# Altium PCB hand_shank.PcbDoc
Units mil, origin at the board's own origin, x right, y up, seen from the top; angles counter-clockwise.
Board outline 2952.71 x 2952.71 mil, 2 copper layers (Top Layer, Bottom Layer), stack 62.192 mil thick; 73 components, 56 nets, 284 pads, 302 vias.
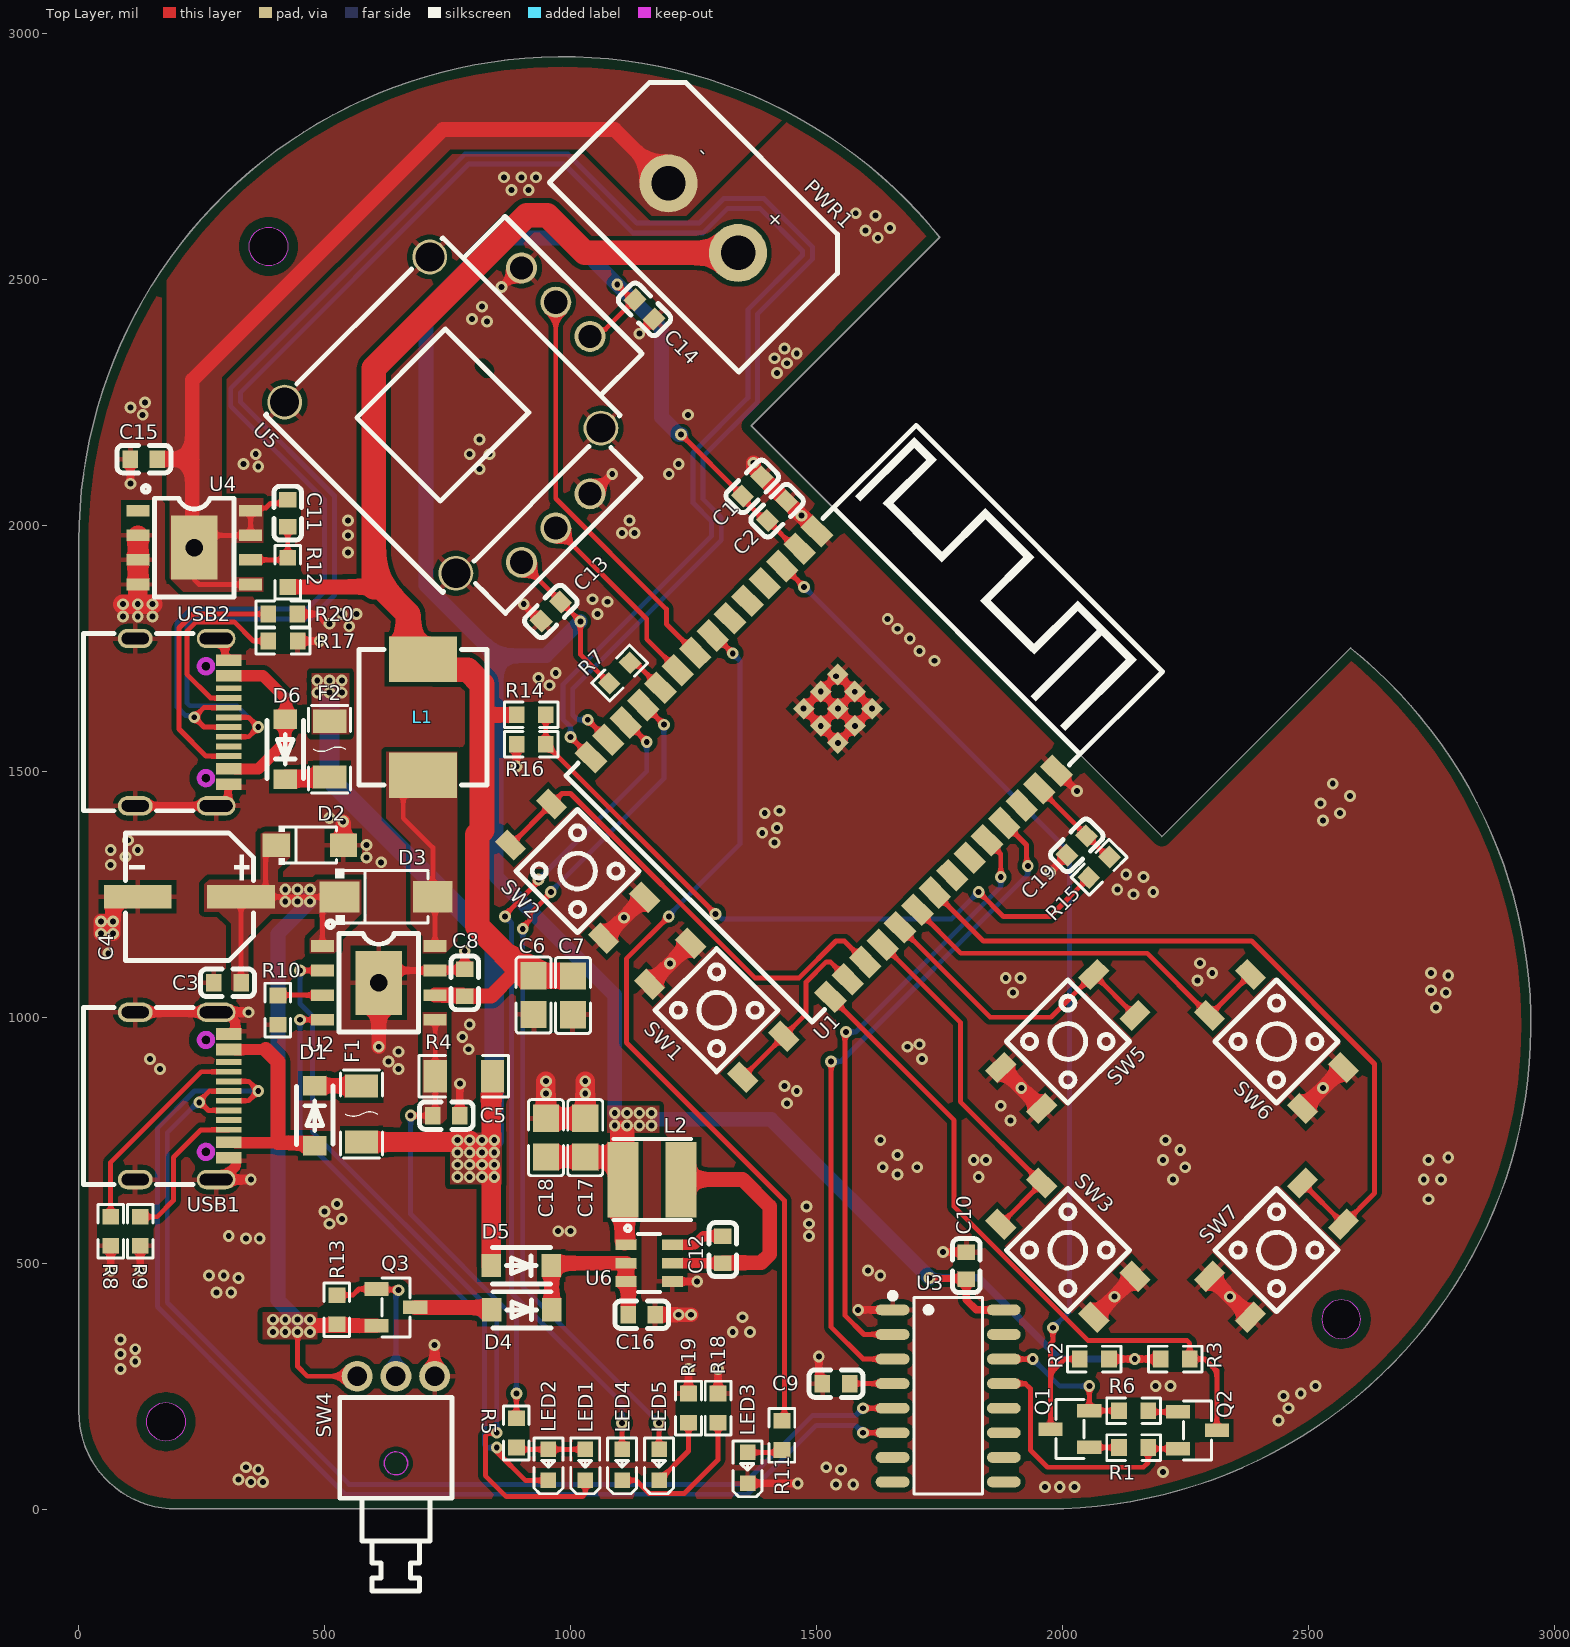
[diagram p0: Top Layer view]
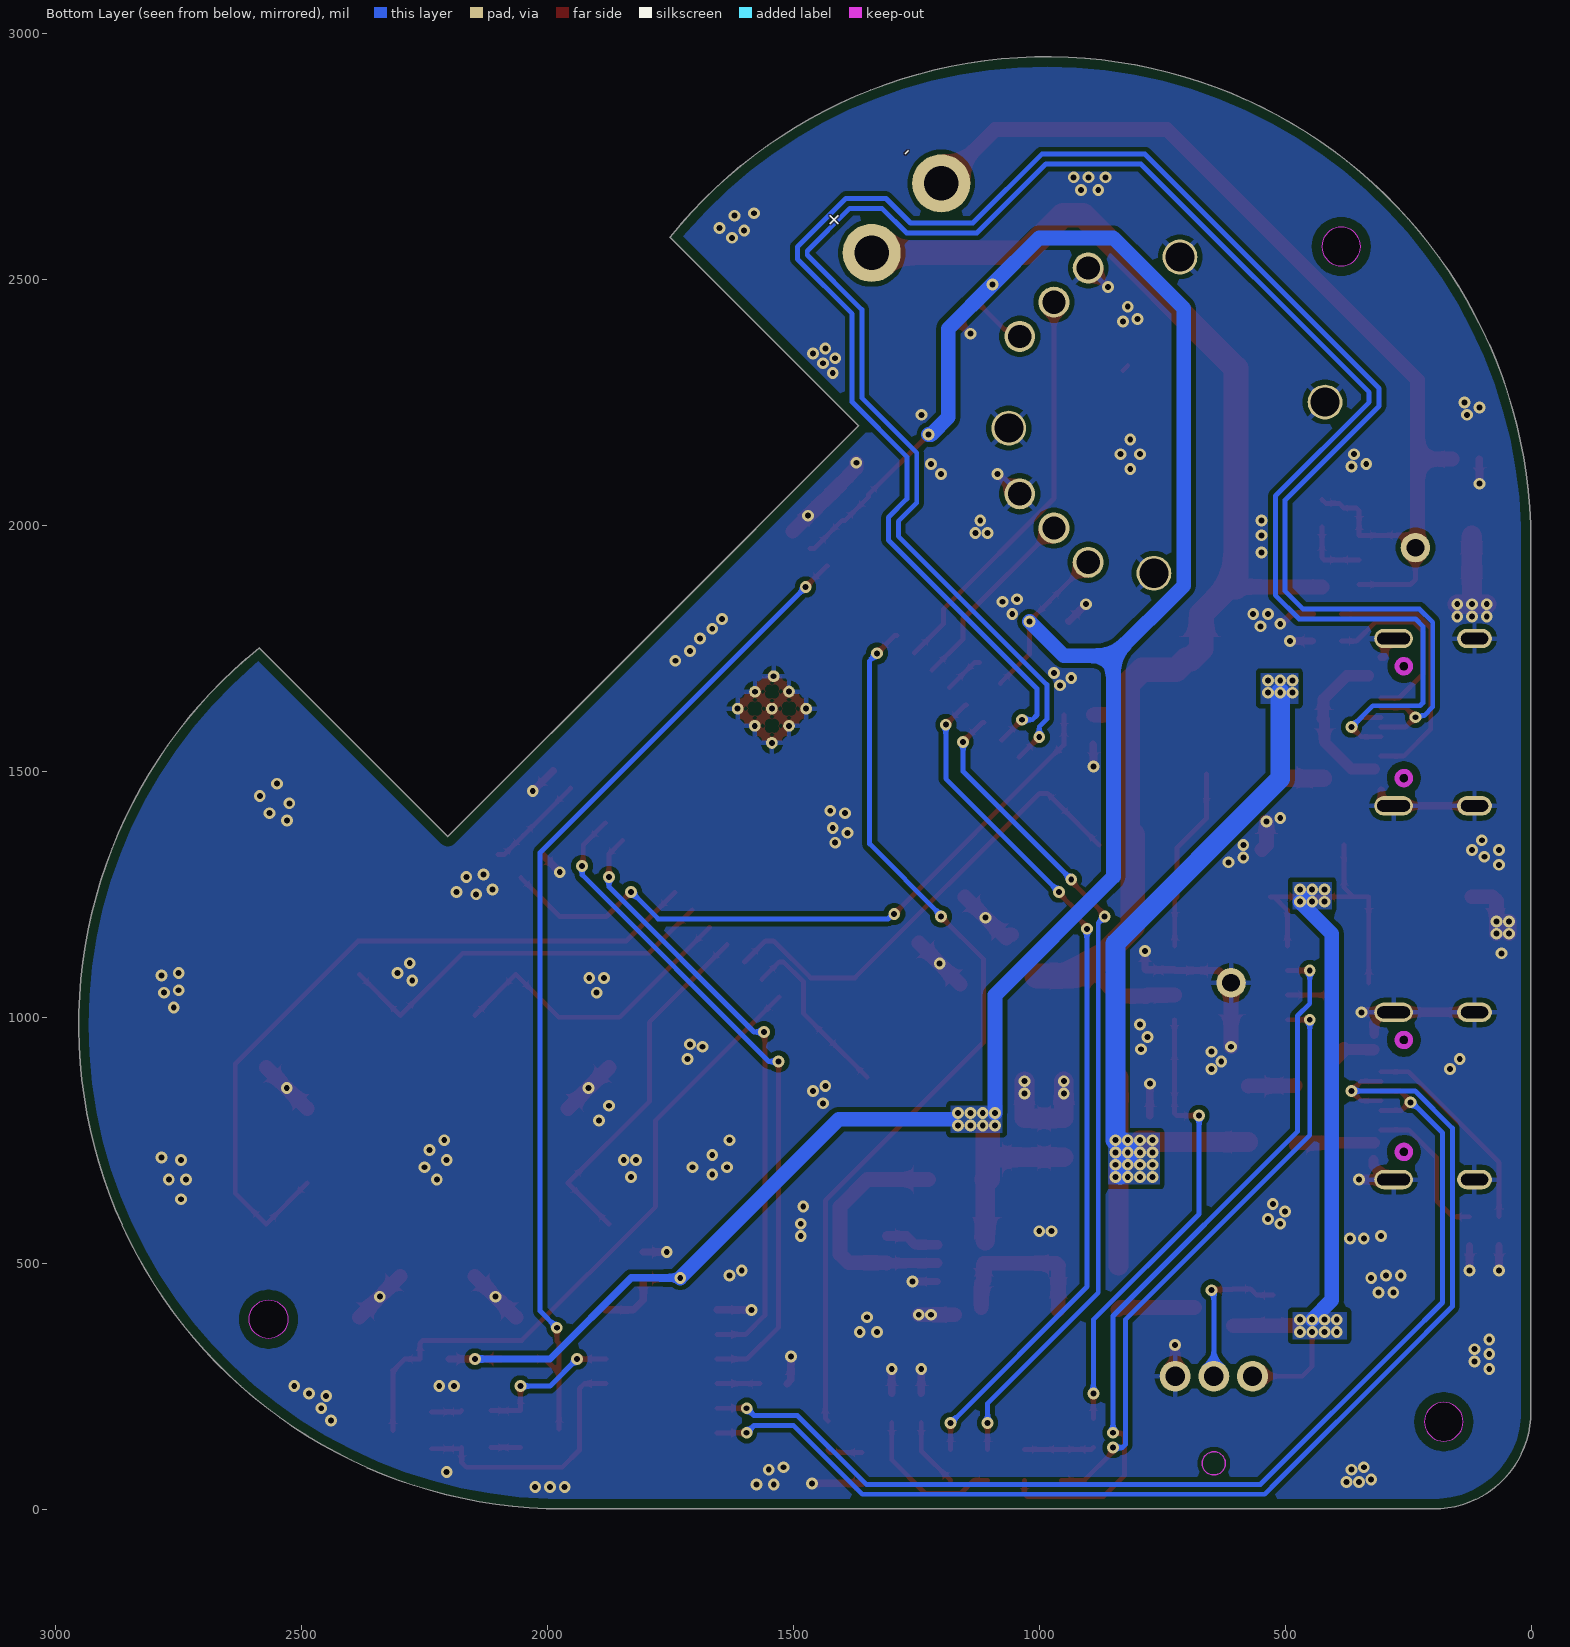
[diagram p1: Bottom Layer view, seen from below]
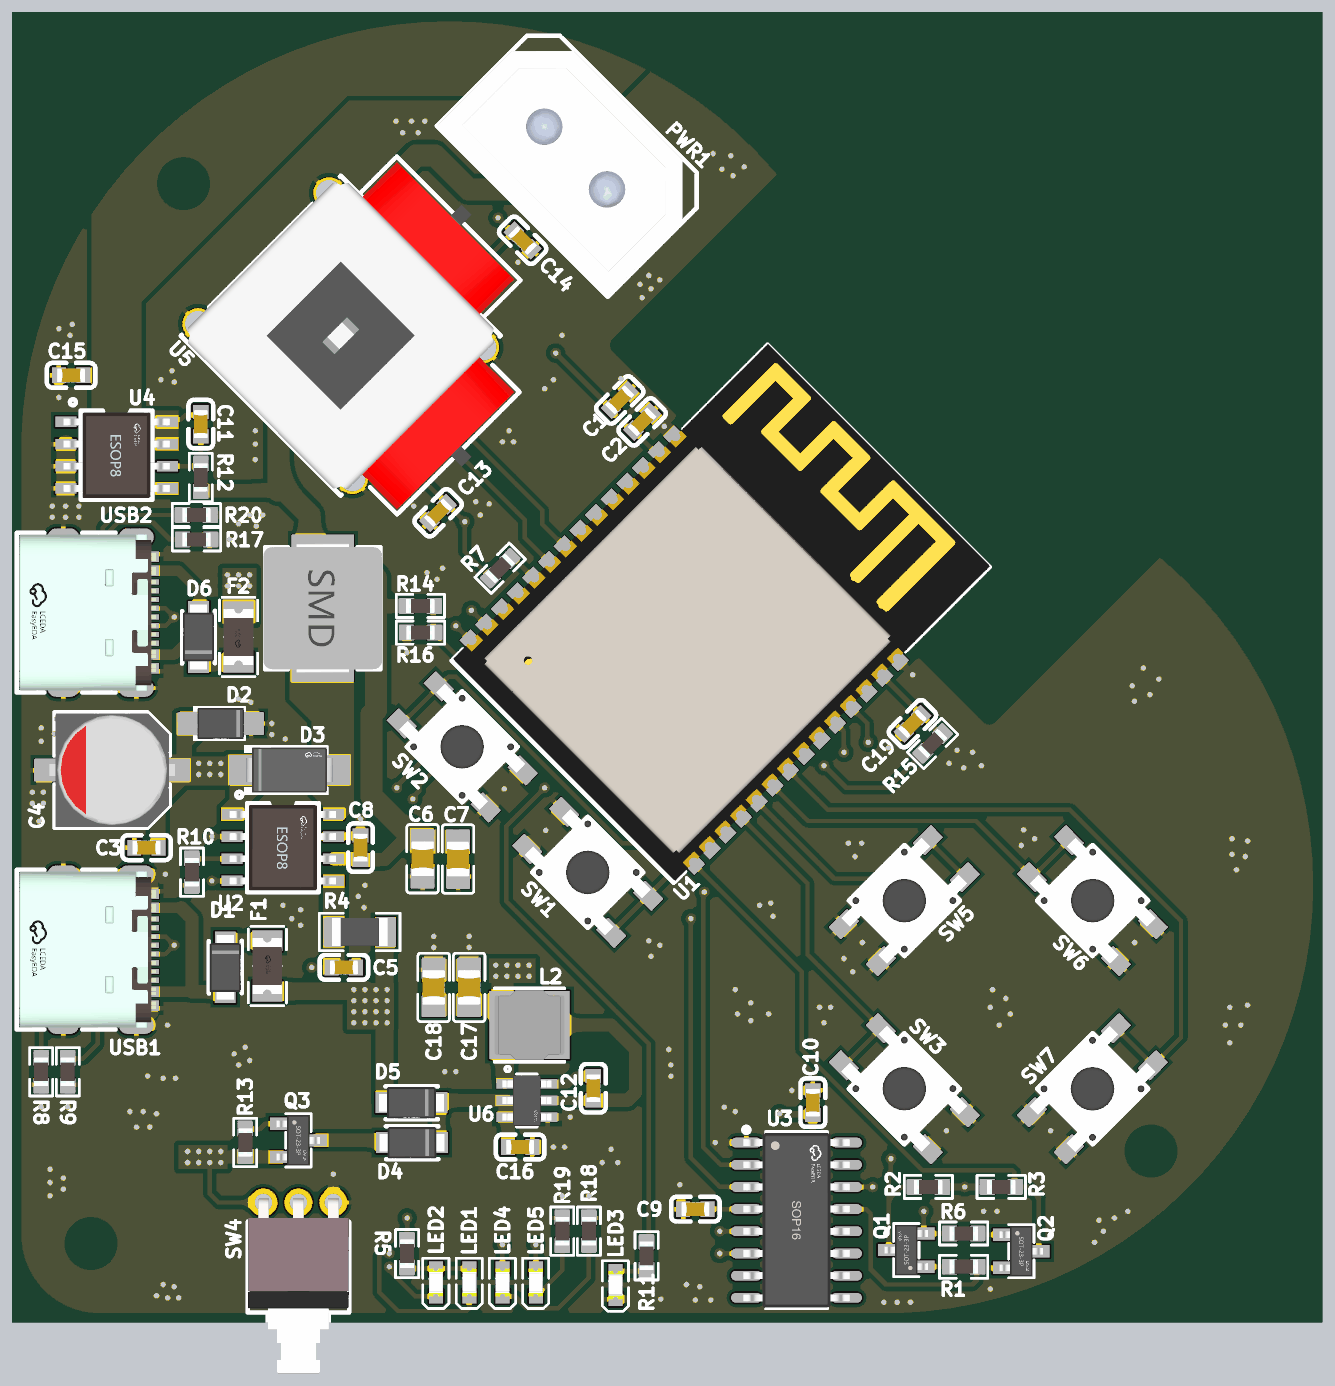
[diagram p2: 3D render of the assembled board from above, using the file's embedded part models]

## Layer stack, top to bottom
Top Solder: solder mask 0.4, Solder Resist, Dk 3.5
Top Layer: signal copper 1.4
Dielectric 1: dielectric 59.3921, FR-4, Dk 4.8
Bottom Layer: signal copper 1.4
Bottom Solder: solder mask 0.4, Solder Resist, Dk 3.5

## Board outline
195.55,0.26 198.66,0.26 cw(c197.11,197.11) 0.26,198.66 0.26,1968.76 cw(c984.51,1968.76) 1751.02,2586.18 1367.44,2202.61 1785.02,1785.02 2202.61,1367.44 2586.18,1751.02 cw(c1968.76,984.51) 1968.76,0.26
cut-out: 2527.93,385.97 ccw(c2567.3,385.97) 2567.3,346.6 ccw(c2567.3,385.97) 2606.67,385.97 ccw(c2567.3,385.97) 2567.3,425.34 ccw(c2567.3,385.97)
cut-out: 385.97,2527.93 cw(c385.97,2567.3) 346.6,2567.3 cw(c385.97,2567.3) 385.97,2606.67 cw(c385.97,2567.3) 425.34,2567.3 cw(c385.97,2567.3)
cut-out: 138.05,177.42 cw(c177.42,177.42) 177.42,216.79 cw(c177.42,177.42) 216.79,177.42 cw(c177.42,177.42) 177.42,138.05 cw(c177.42,177.42)

## Design rules (kind name [scope] priority, off if disabled: settings)
AssemblyTestPointUsage [All] p1: isadvanced=TRUE
AssemblyTestpoint [All] p1: isadvanced=TRUE testpointundercomponent=TRUE minsize=40 maxsize=100 preferedsize=60 minholesize=0 maxholesize=40 preferedholesize=32 testpointgrid=1 usegrid=TRUE gridtolerance=0.01 allowsidetop=TRUE allowsidebottom=TRUE
BoardOutlineClearance Footprint_BoardOutlineClearance [HasFootprint('USB-C-SMD_KH-TYPE-C-16P')] p1: isadvanced=TRUE gap=0 ignorepadtopadclearanceinfootprint=FALSE
BoardOutlineClearance TopLayer_BoardOutlineClearance [(OnLayer('Top Overlay'))] p2: isadvanced=TRUE gap=0 ignorepadtopadclearanceinfootprint=FALSE
BoardOutlineClearance [All] p3: isadvanced=TRUE gap=20 ignorepadtopadclearanceinfootprint=FALSE except(0: Arc-SplitContinuation Track-SplitContinuation SMDPad-SplitContinuation THPad-SplitContinuation Via-SplitContinuation Fill-SplitContinuation Poly-SplitContinuation Region-SplitContinuation Text-OutlineEdge Text-CavityEdge Text-CutoutEdge Text-SplitBarrior Text-SplitContinuation; 25: SMDPad-OutlineEdge SMDPad-CavityEdge SMDPad-CutoutEdge SMDPad-SplitBarrior Via-OutlineEdge Via-CavityEdge Via-CutoutEdge Via-SplitBarrior; 30: THPad-OutlineEdge THPad-CavityEdge THPad-CutoutEdge THPad-SplitBarrior)
Clearance type-c [HasFootprint('USB-C-SMD_KH-TYPE-C-16P')] p1: isadvanced=TRUE gap=0 ignorepadtopadclearanceinfootprint=TRUE
Clearance Clearance_1 [InNetClass('Power') And OnMid vs OnMid] p2: gap=10 ignorepadtopadclearanceinfootprint=FALSE sourcerule=60 cellrowname=Power cellrowtype=2 cellcolname=All cellcoltype=0 innerlayers=TRUE
Clearance Clearance_2 [InNetClass('Power') And (ExistsOnLayer('Top Layer') Or ExistsOnLayer('Bottom Layer')) vs (ExistsOnLayer('Top Layer') Or ExistsOnLayer('Bottom Layer'))] p3: gap=10 ignorepadtopadclearanceinfootprint=FALSE sourcerule=60 cellrowname=Power cellrowtype=2 cellcolname=All cellcoltype=0 outerlayers=TRUE
Clearance Clearance_3 [InNetClass('Power')] p4: gap=10 ignorepadtopadclearanceinfootprint=FALSE sourcerule=60 cellrowname=Power cellrowtype=2 cellcolname=All cellcoltype=0
Clearance Clearance_1 [InNetClass('Power') And OnMid vs InNetClass('Power') And OnMid] p5: gap=10 ignorepadtopadclearanceinfootprint=FALSE sourcerule=60 cellrowname=Power cellrowtype=2 cellcolname=Power cellcoltype=2 innerlayers=TRUE
Clearance Clearance_2 [InNetClass('Power') And (ExistsOnLayer('Top Layer') Or ExistsOnLayer('Bottom Layer')) vs InNetClass('Power') And (ExistsOnLayer('Top Layer') Or ExistsOnLayer('Bottom Layer'))] p6: gap=10 ignorepadtopadclearanceinfootprint=FALSE sourcerule=60 cellrowname=Power cellrowtype=2 cellcolname=Power cellcoltype=2 outerlayers=TRUE
Clearance Clearance_3 [InNetClass('Power') vs InNetClass('Power')] p7: gap=10 ignorepadtopadclearanceinfootprint=FALSE sourcerule=60 cellrowname=Power cellrowtype=2 cellcolname=Power cellcoltype=2
Clearance Clearance_1 [OnMid vs OnMid] p8: gap=6 ignorepadtopadclearanceinfootprint=FALSE except(6.9: Arc-Hole Track-Hole SMDPad-Hole THPad-Hole Via-Hole Fill-Hole Poly-Hole Region-Hole Text-Hole; 10: Hole-Hole) sourcerule=60 cellrowname=All cellrowtype=0 cellcolname=All cellcoltype=0 innerlayers=TRUE
Clearance Clearance_2 [(ExistsOnLayer('Top Layer') Or ExistsOnLayer('Bottom Layer')) vs (ExistsOnLayer('Top Layer') Or ExistsOnLayer('Bottom Layer'))] p9: gap=6 ignorepadtopadclearanceinfootprint=FALSE except(6.9: Arc-Hole Track-Hole SMDPad-Hole THPad-Hole Via-Hole Fill-Hole Poly-Hole Region-Hole Text-Hole; 10: Hole-Hole) sourcerule=60 cellrowname=All cellrowtype=0 cellcolname=All cellcoltype=0 outerlayers=TRUE
Clearance [All] p10: gap=10 ignorepadtopadclearanceinfootprint=FALSE ismatrix=TRUE miname0="All Differential Pairs" mitype0=4 miname1=Power mitype1=2
ComponentClearance [All] p1: isadvanced=TRUE gap=10 collisioncheckmode=3 verticalgap=10 showdistances=FALSE
DiffPairsRouting "Schematic Differential Pairs Routing" [InNetClass('Power')] p1: maxlimit=10 minlimit=10 mostfreqgap=10 toplayer_minwidth=15 toplayer_maxwidth=15 toplayer_prefwidth=15 bottomlayer_minwidth=15 bottomlayer_maxwidth=15 bottomlayer_prefwidth=15 maxuncoupledlength=500
DiffPairsRouting "Schematic Differential Pairs Routing_1" [InDifferentialPairClass('All Differential Pairs')] p2: maxlimit=10 minlimit=10 mostfreqgap=10 toplayer_minwidth=10 toplayer_maxwidth=10 toplayer_prefwidth=10 bottomlayer_minwidth=10 bottomlayer_maxwidth=10 bottomlayer_prefwidth=10 maxuncoupledlength=500
DiffPairsRouting [All] p3: maxlimit=10 minlimit=10 mostfreqgap=10 toplayer_minwidth=15 toplayer_maxwidth=15 toplayer_prefwidth=15 bottomlayer_minwidth=15 bottomlayer_maxwidth=15 bottomlayer_prefwidth=15 maxuncoupledlength=500
FabricationTestPointUsage [All] p1: isadvanced=TRUE valid=0 allowmultiple=FALSE
FabricationTestpoint [All] p1: isadvanced=TRUE side=3 testpointundercomponent=TRUE minsize=40 maxsize=100 preferedsize=60 minholesize=0 maxholesize=40 preferedholesize=32 testpointgrid=1 allowsidetop=TRUE allowsidebottom=TRUE usegrid=TRUE gridtolerance=0.01
FanoutControl Fanout_BGA [IsBGA] p1: isadvanced=TRUE bgadir=Out bgaviamode=Centered fanoutstyle=Auto fanoutdirection=Alternating viagrid=1 // Fanout_BGA (Default Rule)
FanoutControl Fanout_LCC [IsLCC] p2: isadvanced=TRUE bgadir=Out bgaviamode=Centered fanoutstyle=Auto fanoutdirection=Alternating viagrid=1 // Fanout_LCC (Default Rule)
FanoutControl Fanout_SOIC [IsSOIC] p3: isadvanced=TRUE bgadir=Out bgaviamode=Centered fanoutstyle=Auto fanoutdirection=Alternating viagrid=1 // Fanout_SOIC (Default Rule)
FanoutControl Fanout_Small [(CompPinCount < 5)] p4: isadvanced=TRUE bgadir=Out bgaviamode=Centered fanoutstyle=Auto fanoutdirection=OutThenIn viagrid=1 // Fanout_Small (Default Rule)
FanoutControl Fanout_Default [All] p5: isadvanced=TRUE bgadir=Out bgaviamode=Centered fanoutstyle=Auto fanoutdirection=Alternating viagrid=1 // Fanout_Default (Default Rule)
Height [All] p1: isadvanced=TRUE minheight=0 maxheight=1000 prefheight=500
HoleSize [All] p1: isadvanced=TRUE absolutevalues=TRUE maxlimit=100 minlimit=1 maxpercent=80.000 minpercent=20.000
HoleToHoleClearance [All] p1: isadvanced=TRUE gap=10 allowstackedmicrovias=TRUE
LayerPairs [All] p1: isadvanced=TRUE enforce=TRUE
MinimumSolderMaskSliver TypeC_MinimumSolderMaskSliver [HasFootprint('USB-C-SMD_KH-TYPE-C-16P') vs HasFootprint('USB-C-SMD_KH-TYPE-C-16P')] p1: isadvanced=TRUE minsoldermaskwidth=2
MinimumSolderMaskSliver [All] p2: isadvanced=TRUE minsoldermaskwidth=6
NetAntennae [All] p1: isadvanced=TRUE netantennaetolerance=0
PasteMaskExpansion [All] p1: isadvanced=TRUE expansion=0
PlaneClearance [All] p1: isadvanced=TRUE clearance=20
PlaneConnect [All] p1: isadvanced=TRUE planeconnectstyle=Relief reliefexpansion=20 reliefentries=4 reliefconductorwidth=10 reliefairgap=10
PolygonConnect Solid [InNetClass('Power') AND (Net <> 'GND')] p1: isadvanced=TRUE connectstyle=Direct reliefconductorwidth=10 reliefentries=2 polygonreliefangle="0 Angle" airgapwidth=10
PolygonConnect "Schematic Polygon Connect Style" [InNetClass('Power')] p2: thpad.connectstyle=Relief thpad.reliefconductorwidth=10 thpad.reliefentries=4 thpad.polygonreliefangle="90 Angle" thpad.airgapwidth=10 smdpad.connectstyle=Relief smdpad.reliefconductorwidth=10 smdpad.reliefentries=4 smdpad.polygonreliefangle="90 Angle" smdpad.airgapwidth=10 via.connectstyle=Direct via.reliefconductorwidth=10 via.reliefentries=4 via.polygonreliefangle="90 Angle" via.airgapwidth=10
PolygonConnect [All] p3: thpad.connectstyle=Relief thpad.reliefconductorwidth=10 thpad.reliefentries=4 thpad.polygonreliefangle="90 Angle" thpad.airgapwidth=10 smdpad.connectstyle=Relief smdpad.reliefconductorwidth=10 smdpad.reliefentries=4 smdpad.polygonreliefangle="90 Angle" smdpad.airgapwidth=10 via.connectstyle=Direct via.reliefconductorwidth=10 via.reliefentries=4 via.polygonreliefangle="90 Angle" via.airgapwidth=10
RoutingCorners [All] p1: isadvanced=TRUE cornerstyle=45-Degree minsetback=100 maxsetback=100
RoutingPriority [All] p1: isadvanced=TRUE routingpriority=0
RoutingVias "Schematic Routing Via Style" [InNetClass('Power')] p1: holewidth=12 width=24 viastyle="Through Hole" minholewidth=12 minwidth=24 maxholewidth=12 maxwidth=24
RoutingVias [All] p2: holewidth=12 width=24 viastyle="Through Hole" minholewidth=12 minwidth=24 maxholewidth=12 maxwidth=24
ShortCircuit [All] p1: isadvanced=TRUE allowed=FALSE
SilkToSilkClearance [All] p1: isadvanced=TRUE silktosilkclearance=0
SilkToSolderMaskClearance [IsPad] p1: isadvanced=TRUE minsilkscreentomaskgap=0 clearancetoexposedcopper=TRUE
SolderMaskExpansion ViaMaskExpansion [IsVia] p1: isadvanced=TRUE expansion=4 istentingtop=TRUE
SolderMaskExpansion [All] p2: isadvanced=TRUE expansion=4 istentingtop=FALSE
SupplyNets "Schematic Supply Nets_5" [InNet('PW_5V')] p1: isadvanced=TRUE voltage=0.000
SupplyNets "Schematic Supply Nets_4" [InNet('PW_BAT4.2V')] p2: isadvanced=TRUE voltage=0.000
SupplyNets "Schematic Supply Nets_3" [InNet('PW_D3.3V')] p3: isadvanced=TRUE voltage=0.000
SupplyNets "Schematic Supply Nets_2" [InNet('PW_D5V')] p4: isadvanced=TRUE voltage=0.000
SupplyNets "Schematic Supply Nets_1" [InNet('GND')] p5: isadvanced=TRUE voltage=0.000
SupplyNets "Schematic Supply Nets" [InNet('PW_USB5V')] p6: isadvanced=TRUE voltage=0.000
UnRoutedNet [All] p1: isadvanced=TRUE
UnpouredPolygon [All] p1: isadvanced=TRUE
Width "Schematic Width Constraint" [InNetClass('Power')] p1: maxlimit=150 minlimit=10 preferedwidth=30 minimp=50.000000 maximp=50.000000 favimp=50.000000
Width [All] p2: maxlimit=10 minlimit=10 preferedwidth=10
3 further rules are at their usual default settings.

## Classes and differential pairs
net class Power: GND NetC5_2 NetC11_2 NetC12_1 NetC12_2 NetD1_1 NetD1_2 NetD3_2 NetD4_2 NetD6_1 NetD6_2 PW_5V PW_BAT4.2V PW_D3.3V PW_D5V PW_USB5V
differential pair D2: +D2_P -D2_N
differential pair D: +D_P -D_N

## Components (designator, comment, footprint, x,y, rotation, side; value= is the part's Value field where it differs from the comment)
C1 "10uF ±20%" C0603 1369.49,2079.49 r225 top locked
C2 "100nF ±10%" C0603 1420,2030 r225 top locked
C3 "100nF ±10%" C0603 302.44,1070 r0 top locked
C4 "47uF ±20%" CAP-SMD_BD6.3-L6.5-W6.5-LS7.2-FD 225,1245 r180 top locked
C5 "10uF ±20%" C0603 747.56,800 r180 top
C6 "22uF ±20%" C0805 925,1045 r90 top
C7 "22uF ±20%" C0805 1005,1044.37 r90 top
C8 "100nF ±10%" C0603 785,1070 r90 top
C9 "100nF ±10%" C0603 1540,255 r0 top locked
C10 "100nF ±10%" C0603 1805,495 r270 top locked
C11 "4.7uF ±10%" C0603 425,2025 r90 top locked
C12 "100nF ±10%" C0603 1310,527.56 r270 top locked
C13 "100nF ±10%" C0603 960,1825 r45 top
C14 "100nF ±10%" C0603 1150.51,2439.49 r135 top
C15 "2.2uF ±10%" C0603 132.56,2135 r180 top locked
C16 "10uF ±20%" C0603 1145,395 r0 top locked
C17 "22uF ±20%" C0805 1030,755 r270 top locked
C18 "22uF ±20%" C0805 950,755 r270 top locked
C19 "100nF ±10%" C0603 2029.49,1349.49 r45 top
D1 "SS14L" SOD-123F_L2.8-W1.8-LS3.7-RD 480,800 r270 top
D2 "SMF5.0A" SOD-123FL_L2.7-W1.8-LS3.8-RD 470,1350 r0 top locked
D3 "SS32" SMA_L4.3-W2.6-LS5.0-RD 625,1245 r0 top
D4 "SS14L" SOD-123F_L2.8-W1.8-LS3.7-RD 901.02,405 r180 top locked
D5 "SS14L" SOD-123F_L2.8-W1.8-LS3.7-RD 900,495 r180 top locked
D6 "SS14L" SOD-123F_L2.8-W1.8-LS3.7-RD 420,1545 r90 top
F1 "3A" F1206 575,803.11 r270 top
F2 "3A" F1206 510,1545 r90 top
L1 "10uH ±20%" IND-SMD_L7.3-W6.8 700,1610 r270 top
L2 "3.9uH ±20%" IND-SMD_L4.0-W4.0_FNR40XXS 1165.94,670 r180 top locked
LED1 "LED-RED" LED0603-RD 1030.26,89.71 r90 top locked
LED2 "LED-GREEN" LED0603-RD 955.26,89.71 r90 top locked
LED3 "LED-BLUE" LED0603-RD 1360.01,83.53 r90 top
LED4 "LED-YELLOW" LED0603-RD 1105.26,89.71 r90 top locked
LED5 "LED-YELLOW" LED0603-RD 1180.26,89.71 r90 top locked
PWR1 "2P" CONN-TH_HC-C5080-2AS 1270,2625 r135 top locked
Q1 "SS8050" SOT-23-3 2015.63,162.6 r0 top locked
Q2 "SS8050" SOT-23-3 2275,160 r180 top locked
Q3 "SI2301-ZE" SOT-23-3 645,410 r180 top locked
R1 "10kΩ ±1%" R0603 2145,125 r0 top locked
R2 "10kΩ ±1%" R0603 2065.34,305 r180 top locked
R3 "10kΩ ±1%" R0603 2229.66,305 r0 top locked
R4 "300mΩ ±1%" R1206 783.22,880 r0 top locked
R5 "1kΩ ±1%" R0603 890,154.66 r90 top
R6 "10kΩ ±1%" R0603 2145,200 r180 top locked
R7 "10kΩ ±1%" R0603 1100,1700 r45 top
R8 "5.1kΩ ±1%" R0603 65,564.66 r90 top
R9 "5.1kΩ ±1%" R0603 125,564.66 r90 top
R10 "1.5kΩ ±1%" R0603 405,1014.66 r90 top
R11 "330Ω ±1%" R0603 1430,149.66 r90 top
R12 "100Ω ±1%" R0603 425,1904.66 r90 top locked
R13 "100kΩ ±1%" R0603 525,405.34 r270 top locked
R14 "100kΩ ±1%" R0603 920,1615 r180 top
R15 "1kΩ ±1%" R0603 2075,1305 r45 top
R16 "360kΩ ±1%" R0603 920.34,1555 r180 top
R17 "5.1kΩ ±1%" R0603 415.34,1765 r180 top
R18 "330Ω ±1%" R0603 1300,205.34 r270 top
R19 "330Ω ±1%" R0603 1240,205.34 r270 top
R20 "5.1kΩ ±1%" R0603 415,1820 r180 top
SW1 "TS-1109S-C-J" SW-SMD_4P-L4.5-W4.5-P3.00-LS7.0 1297.19,1014.35 r315 top locked
SW2 "TS-1109S-C-J" SW-SMD_4P-L4.5-W4.5-P3.00-LS7.0 1014.35,1297.19 r135 top locked
SW3 "TS-1109S-C-J" SW-SMD_4P-L4.5-W4.5-P3.00-LS7.0 2011.37,526.45 r135 top locked
SW4 "TK-6580B-1" SW-TH_TK-6580B-1 645,270 r0 top locked
SW5 "TS-1109S-C-J" SW-SMD_4P-L4.5-W4.5-P3.00-LS7.0 2011.37,950.71 r225 top locked
SW6 "TS-1109S-C-J" SW-SMD_4P-L4.5-W4.5-P3.00-LS7.0 2435.63,950.71 r315 top locked
SW7 "TS-1109S-C-J" SW-SMD_4P-L4.5-W4.5-P3.00-LS7.0 2435.63,526.45 r225 top locked
U1 "ESP32-C6-WROOM-1-N8" WIRELM-SMD_ESP32-C6-WROOM-1 1515,1515 r315 top locked
U2 "TP5400" ESOP-8_L4.9-W3.9-P1.27-LS6.0-BL-EP 610,1070 r270 top locked
U3 "CH340C" SOP-16_L10.0-W3.9-P1.27-LS6.0-BL 1768.09,230 r270 top locked
U4 "IP3005A" ESOP-8_L4.9-W3.9-P1.27-LS6.0-BL-EP 235,1955 r270 top locked
U5 "YA13-FL7.4-B5Ka(45-10)-R-Y06" RES-ADJ-TH_YA13-FL7.4-B5KA-45-10-R-Y06_1 809.29,2237.64 r45 top locked
U6 "AP63203WU-7" TSOT-26_L2.9-W1.6-P0.95-LS2.8-BL 1160,500 r270 top locked
USB1 "KH-TYPE-C-16P" USB-C-SMD_KH-TYPE-C-16P 210,840 r270 top locked
USB2 "KH-TYPE-C-16P" USB-C-SMD_KH-TYPE-C-16P 210,1600 r270 top locked

## Footprints (in the part's own frame and the unit in brackets; to place one, negate y for a bottom-side part, rotate by r counter-clockwise, add the part's x,y. Pads: shape width x height; smd on the part's side, far side on the other; paste and mask are expansions set on the pad)
C0603 [mm]
  rect 0.8x0.9 smd: 1(-0.7,0) 2(0.7,0)
  silkscreen extent -1.39,-0.71 1.39,0.71, body extent -0.8,-0.4 0.8,0.4, height 0.8
C0805 [mm]
  rect 1.41x1.35 smd paste-100 mask+0.051: 1(-1,0) 2(1,0)
  silkscreen extent -1.96,-0.9 1.96,0.9, body extent -1,-0.65 1,0.65, height 1.3
CAP-SMD_BD6.3-L6.5-W6.5-LS7.2-FD [mm]
  rect 3.5x1.2 smd paste+0.051: 1(-2.67,0) 2(2.67,0)
  silkscreen extent -3.3,-3.3 3.3,3.3, body extent -3.6,-3.25 3.6,3.25, height 7.7
CONN-TH_HC-C5080-2AS [mm]
  round 3 hole 1.78: 1(-2.54,0) 2(2.54,0)
  silkscreen extent -6.92,-4.32 6.92,4.32, body extent -6.93,-4.25 6.93,4.25, height 10.5
ESOP-8_L4.9-W3.9-P1.27-LS6.0-BL-EP [mm]
  rect 0.6x1.2 smd: 1(-1.905,-2.908) 2(-0.635,-2.908) 3(0.635,-2.908) 4(1.905,-2.908) 5(1.905,2.908) 6(0.635,2.908) 7(-0.635,2.908) 8(-1.905,2.908)
  rect 3.3x2.4 smd: 9(0,0)
  silkscreen extent -3.2,-2.67 2.55,2.05, body extent -2.45,-3.05 2.45,3.05, height 1.7
F1206 [mm]
  rect 1.19x1.728 smd: 1(-1.445,0) 2(1.445,0)
  silkscreen extent -2.27,-1.09 2.27,1.09, body extent -1.6,-0.85 1.6,0.85, height 0.6
IND-SMD_L4.0-W4.0_FNR40XXS [mm]
  rect 1.6x3.9 smd: 1(-1.5,0) 2(1.5,0)
  silkscreen extent -2,-2.1 2,2.1, body extent -2,-2 2,2, height 2.61
IND-SMD_L7.3-W6.8 [mm]
  rect 2.35x3.5 smd paste+0.051: 1(-3,0) 2(3,0)
  silkscreen extent -3.5,-3.3 3.5,3.3, body extent -3.71,-3.4 3.71,3.4, height 3.05
LED0603-RD [mm]
  rect 0.8x0.8 smd: 1(-0.799,0) 2(0.799,0)
  silkscreen extent -1.49,-0.75 1.39,0.76, body extent -0.81,-0.41 0.81,0.41, height 0.56
R0603 [mil]
  rect 31.75x34.02 smd paste-3937.01 mask+2: 1(-29.66,0) 2(29.66,0)
  silkscreen extent -55,-26 55,26, body extent -32,-16 32,16, height 18
R1206 [mil]
  rect 47.54x66.97 smd paste-3937.01 mask+2: 1(-58.22,0) 2(58.22,0)
  silkscreen extent -91,-42 91,42, body extent -63,-31 63,32, height 22
RES-ADJ-TH_YA13-FL7.4-B5KA-45-10-R-Y06_1 [mm]
  round 1.6 hole 1.2 paste-2539.97 mask+0.05: 1(6.775,3.5) 2(6.775,1) 3(6.775,-1.5) 4(1.025,-7.25) 5(-1.475,-7.25) 6(-3.975,-7.25)
  round 1.8 hole 1.5 paste-2539.97 mask+0.05: 7(3.825,7.25) 7(3.825,-5.25) 8(-6.775,7.25) 8(-6.775,-5.25)
  silkscreen extent -7.95,-8.52 8.05,7.48, body extent -7.97,-9.2 8.73,7.5, height 18.4
SMA_L4.3-W2.6-LS5.0-RD [mm]
  rect 2.046x1.62 smd paste+0.051: 1(-2.404,-0.009) 2(2.404,0.009)
  silkscreen extent -2.61,-1.44 2.16,1.44, body extent -2.5,-1.3 2.5,1.3, height 2.23
SOD-123F_L2.8-W1.8-LS3.7-RD [mm]
  rect 1x1.2 smd: 1(-1.55,0) 2(1.55,0)
  silkscreen extent -1.52,-0.93 1.49,0.95, body extent -1.85,-0.89 1.85,0.91, height 1.31
SOD-123FL_L2.7-W1.8-LS3.8-RD [mm]
  rect 1.4x1.2 smd paste+0.051: 1(-1.735,0) 2(1.735,0)
  silkscreen extent -1.6,-1 1.38,1, body extent -1.85,-0.9 1.85,0.9, height 0.88
SOP-16_L10.0-W3.9-P1.27-LS6.0-BL [mm]
  oval 0.56x1.745 smd: 1(-4.445,-2.872) 2(-3.175,-2.872) 3(-1.905,-2.872) 4(-0.635,-2.872) 5(0.635,-2.872) 6(1.905,-2.872) 7(3.175,-2.872) 8(4.445,-2.872) 9(4.445,2.872) 10(3.175,2.872) 11(1.905,2.872) 12(0.635,2.872) 13(-0.635,2.872) 14(-1.905,2.872) 15(-3.175,2.872) 16(-4.445,2.872)
  silkscreen extent -5.33,-3.02 5.08,1.77, body extent -5,-3.05 5,3.05, height 1.7
SOT-23-3 [mm]
  rect 1.25x0.7 smd: 1(1,-0.95) 2(1,0.95) 3(-1,0)
  silkscreen extent -0.73,-1.53 0.73,1.53, body extent -1.25,-1.45 1.25,1.45, height 1.05
SW-SMD_4P-L4.5-W4.5-P3.00-LS7.0 [mm]
  rect 1.4x0.9 smd paste+0.051: 1(-3.4,1.5) 2(3.4,1.5) 3(-3.4,-1.5) 4(3.4,-1.5)
  silkscreen extent -2.25,-2.25 2.25,2.25, body extent -3.24,-2.25 3.26,2.25, height 7.5
SW-TH_TK-6580B-1 [mm]
  round 1.6 hole 1 paste-2539.97: 1(-2,0) 2(0,0) 3(2,0)
  Keep-Out Layer circle w0.003: c0,-4.5 r0.6
  Keep-Out Layer region: 0.6,-4.5 0.6,-4.619 0.509,-4.84 0.34,-5.009 0.119,-5.1 -0.119,-5.1 -0.34,-5.009 -0.509,-4.84 -0.6,-4.619 -0.6,-4.5 -0.6,-4.381 -0.509,-4.16 -0.34,-3.991 -0.119,-3.9 0.119,-3.9 0.34,-3.991 0.509,-4.16 0.6,-4.381 0.6,-4.5 0.6,-4.5
  Keep-Out Layer region: 0.6,-4.5 0.6,-4.619 0.509,-4.84 0.34,-5.009 0.119,-5.1 -0.119,-5.1 -0.34,-5.009 -0.509,-4.84 -0.6,-4.619 -0.6,-4.5 -0.6,-4.381 -0.509,-4.16 -0.34,-3.991 -0.119,-3.9 0.119,-3.9 0.34,-3.991 0.509,-4.16 0.6,-4.381 0.6,-4.5 0.6,-4.5
  silkscreen extent -2.9,-11.1 2.9,-1.1, body extent -2.9,-9.79 2.9,0.21, height 5.7
TSOT-26_L2.9-W1.6-P0.95-LS2.8-BL [mm]
  rect 0.55x1.1 smd paste+0 mask+0.05: 1(-0.95,-1.2) 2(0,-1.2) 3(0.95,-1.2) 4(0.95,1.2) 5(0,1.2) 6(-0.95,1.2)
  silkscreen extent -1.94,-1.24 1.5,0.57, body extent -1.45,-1.4 1.45,1.4, height 0.89
USB-C-SMD_KH-TYPE-C-16P [mm]
  oval 1x2 hole 0.6 slot 1.7 at 90 deg: 1(-4.32,1.765) 2(4.32,1.765)
  oval 1x1.8 hole 0.6 slot 1.4 at 90 deg: 3(-4.32,-2.415) 4(4.32,-2.415)
  rect 0.3x1.3 smd paste-100 mask+0.05: A1(-3.35,2.415) A4(-2.55,2.415) A5(-1.25,2.415) A6(-0.25,2.415) A7(0.25,2.415) A8(1.25,2.415) A9(2.55,2.415) A12(3.35,2.415) B1(3.05,2.415) B4(2.25,2.415) B5(1.75,2.415) B6(0.75,2.415) B7(-0.75,2.415) B8(-1.75,2.415) B9(-2.25,2.415) B12(-3.05,2.415)
  Keep-Out Layer board cut-out: -2.54,1.235 -2.575,1.387 -2.672,1.509 -2.812,1.576 -2.968,1.576 -3.108,1.509 -3.205,1.387 -3.24,1.235 -3.24,1.235 -3.205,1.083 -3.108,0.961 -2.968,0.894 -2.812,0.894 -2.672,0.961 -2.575,1.083 -2.54,1.235
  Keep-Out Layer board cut-out: 3.24,1.235 3.205,1.387 3.108,1.509 2.968,1.576 2.812,1.576 2.672,1.509 2.575,1.387 2.54,1.235 2.54,1.235 2.575,1.083 2.672,0.961 2.812,0.894 2.968,0.894 3.108,0.961 3.205,1.083 3.24,1.235
  Keep-Out Layer circle w0.025: c-2.89,1.235 r0.35
  Keep-Out Layer circle w0.254: c-2.89,1.235 r0.35
  Keep-Out Layer circle w0.025: c2.89,1.235 r0.35
  Keep-Out Layer circle w0.254: c2.89,1.235 r0.35
  silkscreen extent -4.57,-5.08 4.57,0.57, body extent -4.47,-4.93 4.47,2.88, height 3.25
WIRELM-SMD_ESP32-C6-WROOM-1 [mm]
  rect 1.5x0.9 smd paste+0 mask+0.05: 1(-8.75,8.255) 2(-8.75,6.985) 3(-8.75,5.715) 4(-8.75,4.445) 5(-8.75,3.175) 6(-8.75,1.905) 7(-8.75,0.635) 8(-8.75,-0.635) 9(-8.75,-1.905) 10(-8.75,-3.175) 11(-8.75,-4.445) 12(-8.75,-5.715) 13(-8.75,-6.985) 14(-8.75,-8.255) 15(8.75,-8.255) 16(8.75,-6.985) 17(8.75,-5.715) 18(8.75,-4.445) 19(8.75,-3.175) 20(8.75,-1.905) 21(8.75,-0.635) 22(8.75,0.635) 23(8.75,1.905) 24(8.75,3.175) 25(8.75,4.445) 26(8.75,5.715) 27(8.75,6.985) 28(8.75,8.255)
  rect 0.8x0.8 smd paste+0 mask+0.05: 29(-2.755,3.785) 30(-1.505,3.785) 31(-0.255,3.785) 32(-0.255,2.535) 33(-1.505,2.535) 34(-2.755,2.535) 35(-2.755,1.285) 36(-1.505,1.285) 37(-0.255,1.285)
  silkscreen extent -9,-9.84 9,15.74, body extent -9.02,-9.7 8.98,15.8, height 3.16

## Part data
C1 C5 C16: library part CL10A106MA8NRNC, Manufacturer=SAMSUNG, Manufacturer_Part=CL10A106MA8NRNC
C2 C3 C8 C9 C10 C12 C13 C14 C19: library part CL10B104KB8NNNC, Manufacturer=SAMSUNG, Manufacturer_Part=CL10B104KB8NNNC
C4: library part RVE25V47M6X5, Manufacturer=JIERR, Manufacturer_Part=RVE25V47M6X5
C6 C7 C17 C18: library part CL21A226MAQNNNE, Manufacturer=SAMSUNG, Manufacturer_Part=CL21A226MAQNNNE
C11: library part CL10A475KO8NNNC, Manufacturer=SAMSUNG, Manufacturer_Part=CL10A475KO8NNNC
C15: library part CL10A225KB8NNNC, Manufacturer=SAMSUNG, Manufacturer_Part=CL10A225KB8NNNC
D1 D4 D5 D6: Manufacturer=Hottech, Manufacturer_Part=SS14L
D2 D3: Manufacturer=R+O
  D2: Manufacturer_Part=SMF5.0A
  D3: Manufacturer_Part=SS32
F1 F2: library part 12H1300C, Manufacturer=LANSON, Manufacturer_Part=12H1300C
L1: library part FXL0630-100-M, Manufacturer=cjiang, Manufacturer_Part=FXL0630-100-M
L2: library part FNR4030S3R9MT, Manufacturer=cjiang, Manufacturer_Part=FNR4030S3R9MT
LED1: library part NCD0603R1, Manufacturer=nationstar, Manufacturer_Part=NCD0603R1
LED2: library part NCD0603G1, Manufacturer=nationstar, Manufacturer_Part=NCD0603G1
LED3: library part NCD0603B1, Manufacturer=nationstar, Manufacturer_Part=NCD0603B1
LED4 LED5: library part NCD0603Y1, Manufacturer=nationstar, Manufacturer_Part=NCD0603Y1
PWR1: library part HC-C5080-2AS, Manufacturer=HCTL, Manufacturer_Part=HC-C5080-2AS
Q1 Q2: Collector Current (Ic)=1.5A, Collector Cut-Off Current (Icbo)=150nA, Collector-Emitter Breakdown Voltage (Vceo)=25V, Collector-Emitter Saturation Voltage (VCE(sat)@Ic,Ib)=500mV@800mA,80mA, DC Current Gain (hFE@Ic,Vce)=200@100mA,1V, JLCPCB Part Class="Extended Part", Manufacturer=AnBon, Operating Temperature=-55℃~+150℃@(Tj), Power Dissipation (Pd)=225mW, Transition Frequency (fT)=-, Add into BOM=yes, Convert to PCB=yes, Datasheet=https://atta.szlcsc.com/upload/public/pdf/source/20200522/C541705_DD3461D9C64B1D59801CB3041082AFC6.pdf, Manufacturer Part=SS8050, Manufacturer_Part=SS8050, Supplier=LCSC, Supplier Footprint=SOT-23, Transistor Type=NPN
Q3: Manufacturer=HXY, Manufacturer_Part=SI2301-ZE, Symbol=SI2301-ZE
R1 R2 R3 R6 R7: library part 0603WAF1002T5E, Manufacturer=UNI-ROYAL, Manufacturer_Part=0603WAF1002T5E
R4: library part HoYH1206-1W-300mR-1%, Manufacturer=Milliohm, Manufacturer_Part=HoYH1206-1W-300mR-1%
R5 R15: library part 0603WAF1001T5E, Manufacturer=UNI-ROYAL, Manufacturer_Part=0603WAF1001T5E
R8 R9 R17 R20: library part 0603WAF5101T5E, Manufacturer=UNI-ROYAL, Manufacturer_Part=0603WAF5101T5E
R10: library part 0603WAF1501T5E, Manufacturer=UNI-ROYAL, Manufacturer_Part=0603WAF1501T5E
R11 R18 R19: library part 0603WAF3300T5E, Manufacturer=UNI-ROYAL, Manufacturer_Part=0603WAF3300T5E
R12: library part 0603WAF1000T5E, Manufacturer=UNI-ROYAL, Manufacturer_Part=0603WAF1000T5E
R13 R14: library part 0603WAF1003T5E, Manufacturer=UNI-ROYAL, Manufacturer_Part=0603WAF1003T5E
R16: library part 0603WAF3603T5E, Manufacturer=UNI-ROYAL, Manufacturer_Part=0603WAF3603T5E
SW1 SW2 SW3 SW5 SW6 SW7: Manufacturer="XKB Connection", Manufacturer_Part=TS-1109S-C-J, Symbol=TS-1109S-C-J
SW4: Manufacturer=Yuandi, Manufacturer_Part=TK-6580B-1, Symbol=TK-6580B-1
U1: Manufacturer=ESPRESSIF, Manufacturer_Part=ESP32-C6-WROOM-1-N8, Type=MCU
U2: Manufacturer=TOPPOWER, Manufacturer_Part=TP5400, Type=power
U3: Manufacturer=WCH, Manufacturer_Part=CH340C, Type=Interface
U4: Manufacturer=INJOINIC, Manufacturer_Part=IP3005A, Type=power
U5: Manufacturer=YTL, Manufacturer_Part=YA13-FL7.4-B5Ka(45-10)-R-Y06, Type=joystick
U6: Manufacturer=DIODES, Manufacturer_Part=AP63203WU-7, Type=power
USB1 USB2: Manufacturer=kinghelm, Manufacturer_Part=KH-TYPE-C-16P

## Free pads (board coordinates)
  round 60 hole 36: 15(235,1955) 25(610,1070)
  round 24 hole 12: 16(1578.1,1661.9) 17(1613.27,1627.47) 18(1578.47,1592.67) 19(1543.67,1557.87) 20(1508.88,1592.67) 21(1543.67,1627.47) 22(1508.88,1662.26) 23(1540.14,1693.52) 24(1474.08,1627.46)

## Via types
v1: diameter 24, hole 12, Top Layer to Bottom Layer, tented both sides, 302 vias

## Nets (pads, with @x,y where several pads share a name; then routed paths per layer and width w, separated by ;. In a path a pad name is that pad's centre, name@x,y a point inside that pad or via, vN(x,y) a via of type N, cw(c..) or ccw(c..) an arc to the next point about the centre after c; other vN are vias at no path point)
ADC1: U1.8 U5.2 | length 830.7
  Top Layer w10: U5.2 970.06,2054.85 1195,1829.91 1195,1799.64 U1.8
ADC2: U1.9 U5.5 | length 392.1
  Top Layer w10: U5.5 1155,1809.81 1155,1768.93 U1.9
BAT_ADC: C19.2 R15.2 U1.27 | length 203.8
  Top Layer w10: U1.27 2049.45,1369.45 2087.94,1330.97 R15.2@2100.97,1330.97
BAT_LED1: LED4.2 U1.12 | length 1715.8
  Top Layer w10: v1(867,1205) 867,1208.5 935,1276.5 v1(935,1280) ; v1(1105,175) 1105,121.44 LED4.2 ; U1.12 1115.51,1599.49 v1(1155,1560)
  Bottom Layer w10: v1(867,1205) 880,1192 880,440 1105,215 v1(1105,175) ; v1(935,1280) 1155,1500 v1(1155,1560)
BAT_LED2: LED5.2 U1.11 | length 1766.4
  Top Layer w10: v1(903,1179.84) 903,1183.63 917.8,1198.42 917.8,1210.3 960,1252.5 v1(960,1255) ; U1.11 1150.15,1634.85 v1(1190,1595) ; LED5.2 v1(1180.25,174.75)
  Bottom Layer w10: v1(903,1179.84) 903,452 v1(1180.25,174.75) ; v1(960,1255) 1190,1485 v1(1190,1595)
BTN1: SW1.2 SW1.4 U1.16 | length 363.8
  Top Layer w10: SW1.4 SW1.2 1479.23,1007.09 1479.23,1071.61 1520.22,1112.59 1528.5,1112.59 U1.16
BTN2: SW2.2 SW2.4 U1.17 | length 969.1
  Top Layer w10: SW2.2 SW2.4 982.85,1455 1000,1455 1375,1080 1465,1080 1540,1155 1556.8,1155 U1.17
BTN3: SW3.2 SW3.4 U1.18 | length 737
  Top Layer w10: U1.18 1792.86,989.65 1792.86,828.47 SW3.4 SW3.2
BTN4: SW5.1 SW5.3 U1.19 | length 624.1
  Top Layer w10: U1.19 1853.22,1000 1977.14,1000 SW5.3 SW5.1
BTN5: SW6.1 SW6.3 U1.20 | length 800.7
  Top Layer w10: U1.20 1793.8,1130.14 2172.69,1130.14 SW6.3 SW6.1
BTN6: SW7.1 SW7.3 U1.21 | length 1508.4
  Top Layer w10: U1.21 1839.64,1155 2385,1155 2635,905 2635,642.3 SW7.1 SW7.3
D2_N: U1.13 USB2.A7 USB2.B7 | length 3967.7
  Top Layer w10: USB2.A7 254.84,1590.16 v1(235,1610) 254.53,1629.53 USB2.B7 ; v1(1035,1605) 1075.86,1564.14 U1.13
  Bottom Layer w10: v1(235,1610) 232.32,1612.68 222.93,1612.68 222.14,1613.47 217.41,1613.47 199.83,1631.04 199.83,1803.12 226.72,1830 463.43,1830 500,1866.57 500,2051.72 309.14,2242.57 309.14,2279.14 785,2755 995,2755 1135,2615 1261.72,2615 1311.72,2665 1393.28,2665 1491.72,2566.57 1491.72,2541.72 1380.6,2430.6 1380.6,2251.12 1269.14,2139.66 1269.14,2054.14 1306.59,2016.69 1306.59,1970.12 1004.57,1668.1 1004.57,1614.57 1014.14,1605 v1(1035,1605)
D2_P: U1.14 USB2.A6 USB2.B6 | length 4010.9
  Top Layer w10: USB2.B6 345.47,1570.47 v1(365,1590) 345.16,1609.84 USB2.A6 ; v1(1000,1570) 1041.22,1528.78 U1.14
  Bottom Layer w10: v1(365,1590) 321.53,1633.47 225.69,1633.47 219.83,1639.32 219.83,1794.83 235,1810 471.72,1810 520,1858.28 520,2060 329.14,2250.86 329.14,2270.86 793.28,2735 986.72,2735 1126.72,2595 1270,2595 1320,2645 1385,2645 1471.72,2558.28 1471.72,2550 1360.6,2438.88 1360.6,2259.4 1249.14,2147.95 1249.14,2045.86 1286.59,2008.41 1286.59,1978.41 984.57,1676.39 984.57,1606.29 1000,1590.86 v1(1000,1570)
D_N: U3.6 USB1.A7 USB1.B7 | length 2452.5
  Top Layer w10: USB1.A7 345.16,830.16 v1(365,850) 345.47,869.53 USB1.B7 ; v1(1595,155) U3.6
  Bottom Layer w10: v1(365,850) 235.47,850 160,774.53 160,411.72 269.31,302.41 515.81,55.91 541.72,30 1360,30 1500,170 1580,170 v1(1595,155)
D_P: U3.5 USB1.A6 USB1.B6 | length 2265.3
  Top Layer w10: v1(245,827) 247.32,827 263.85,810.47 USB1.B6 ; v1@246.16,828.16 245,829.32 265.52,849.84 USB1.A6 ; v1(1595,205) U3.5
  Bottom Layer w10: v1(245,827) 242,827 180,765 180,420.72 180,420 255.67,344.33 550,50 1351.72,50 1491.72,190 1580,190 v1(1595,205)
DTR: Q2.2 R1.2 U3.13 | length 533.4
  Top Layer w10: U3.13 1925,255 1935,245 1935,120 1970,85 2165,85 2174.66,94.66 R1.2 2177.06,122.6 Q2.2
EN: Q1.3 R2.2 U1.3 | length 2085.6
  Top Layer w10: U1.3 1432.31,1917.69 v1(1475,1875) ; Q1.3 1976.26,276.26 ; v1(1980.99,368.65) 1980.99,341.38 1976.26,336.65 1976.26,276.26 ; R2.2 2005,305 1976.26,276.26
  Bottom Layer w10: v1(1475,1875) 2015,1335 2015,402.66 v1(1980.99,368.65)
GND: C1.1 C2.1 C3.1 C4.2 C5.1 C6.1 C7.1 C8.2 C9.1 C10.1 C13.1 C14.1 C15.2 C16.2 C17.1 C18.1 C19.1 D2.2 LED3.1 pad.16 pad.17 pad.18 pad.19 pad.20 pad.21 pad.22 pad.23 pad.24 pad.25 R8.1 R9.1 R10.1 R16.2 R17.1 R18.1 R19.1 R20.1 SW1.1 SW1.3 SW2.1 SW2.3 SW3.1 SW3.3 SW4.3 SW5.2 SW5.4 SW6.2 SW6.4 SW7.2 SW7.4 U1.1 U1.28 U1.29 U1.30 U1.31 U1.32 U1.33 U1.34 U1.35 U1.36 U1.37 U2.7 U2.9 U3.1 U4.2 U4.3 U4.4 U5.1 U5.4 U5.7 U5.8 U6.4 USB1.1 USB1.2 USB1.3 USB1.4 USB1.A1 USB1.A12 USB1.B1 USB1.B12 USB2.1 USB2.2 USB2.3 USB2.4 USB2.A1 USB2.A12 USB2.B1 USB2.B12 | length 4440.1
  Top Layer w10: U1.36 U1.36@1508.88,1597.67
  Top Layer w15: v1(65,485) R8.1 ; v1(105,2085) C15.2 ; USB2.4 USB2.2 292.58,1429.92 303.84,1441.18 303.84,1460.96 USB2.A12@305.08,1462.2 ; v1(125,485) R9.1 ; USB2.1 286.04,1770.08 297.3,1758.82 297.3,1733.48 298.89,1731.89 USB2.A1 ; R20.1 486.21,1820 506.21,1800 v1(510,1800) ; R17.1 v1(490,1765) ; U2.9 635,1095 U2.7 725.78,1096.28 783.72,1096.28 C8.2 v1(785,1135) ; v1@775,865 v1(775.06,864.94) C5.1 ; v1(860,2485) 898.69,2523.69 U5.1 ; v1(890,1510) 890,1554.32 R16.2 ; v1(905,1840) 939.49,1805.51 C13.1 ; U5.4 1044.35,2064.35 v1(1085,2105) ; v1(1140,2390) C14.1 ; U6.4 v1(1257.6,462.6) ; R19.1 v1(1240,285) ; R18.1 v1(1300,285) ; LED3.1 v1(1462.05,52.05) ; v1(1505,310) 1505,262.44 C9.1 ; U1.29 U1.29@1543.31,1696.69 ; v1(1585,405) U3.1 ; v1(1757.44,522.56) C10.1 ; v1(1975,1295) C19.1 ; U1.28 2029.62,1460 v1(2030,1460) ; U1.36 U1.33 ; U1.36 U1.35 U1.34 ; U1.36 U1.37 U1.32 ; U1.34 pad.23 U1.29@1543.31,1696.69 ; U1.34 U1.33 ; U1.29@1543.31,1696.69 pad.16 ; U1.33 pad.16 ; U1.33 U1.32 ; pad.16 U1.30 U1.31 U1.32
  Top Layer w20: USB1.3 USB1.1 ; USB1.2 293.94,669.92 307.92,683.91 307.92,685.98 320,698.06 USB1.A12@320,710 ; USB1.2@298.33,669.92 v1(349.92,669.92) v1@350,670 ; USB1.B12@318.65,965.98 318.65,990.6 299.18,1010.08 344.92,1010.08 v1(345,1010) ; SW4.3 v1(723.74,333.74)
  Top Layer w30: v1(45,1170) v1(45,1195) v1(70,1195) ; v1(70,1170) v1(70,1195) ; C4.2 78.62,1245 70,1236.38 v1(70,1195) ; v1(537.8,1397.8) 537.8,1350.51 D2.2@546.93,1341.38 ; v1(610,940) U2.9 ; SW2.1@1056.44,1167.74 1060.29,1167.74 SW2.1 v1(1109,1202.54) SW2.3 ; SW1.3 v1(1202.54,1109) SW1.1 ; C16.2 v1(1220,395) v1(1245,395) ; v1(1372,2127.5) 1372,2117.01 1388.98,2100.03 C1.1 1389.49,2098.98 1438.65,2049.81 1439.81,2049.81 U1.1 ; SW5.4 SW5.2 ; SW3.1 v1(2106.02,431.79) SW3.3 ; SW7.4 SW7.2 ; SW6.4 v1(2530.29,856.06) SW6.2
  Top Layer w40: v1(90,1840) v1(120,1840) ; U4.2 U4.3 U4.4 120,1879.5 v1(120,1840) ; v1(150,1840) v1(120,1840) ; v1(950,870) v1(950,845) C18.1 C17.1 v1(1030,845) v1(1030,870)
  other v1: 1965,45 1995,45 2025,45 1540,50 1575,50 350,55 375,55 325,60 2205,75 365,80 1550,80 340,85 1520,85 2440,180 2460,205 2450,230 2485,235 2190,250 2220,250 2515,250 85,285 115,300 85,315 115,325 85,345 1330,360 1365,360 1350,390 2340.98,431.79 280,440 310,440 325,470 265,475 295,475 1630,475 1605,485 340,550 368,550 305,555 1485,555 975,565 1000,565 510,580 1485,580 535,590 500,605 1480,615 525,620 2745,630 2225,670 2735,670 2770,670 1830,675 1665,680 1635,695 1705,695 2250,695 1820,710 1845,710 2205,710 2745,710 2785,715 1665,720 2240,730 1630,750 2210,750 1895,790 1875,820 1440,825 1460,850 1916.72,856.06 1435,860 165,895 650,895 630,910 145,915 1715,915 650,930 793,935 1685,940 1710,945 780,960 795,985 2760,1020 1900,1050 2780,1050 2750,1055 2275,1075 1885,1080 1915,1080 2785,1085 2305,1090 2750,1090 2280,1110 60,1130 2145,1250 2185,1255 2112,1260 2165,1285 2130,1290 65,1310 615,1315 585,1325 95,1326.37 65,1340 120,1340 585,1350 1415,1355 100,1360 1390,1375 1420,1385 2530,1400 510,1405 1395,1415 2565,1415 1425,1420 2525,1435 2585,1450 2550,1475 957.57,1675 935,1690 970,1700 1740,1725 1710,1745 1690,1770 1665,1790 550,1795 1645,1810 90,1815 120,1815 150,1815 535,1820 565,1820 1055,1820 1075,1845 1045,1850 547.86,1945 547.86,1980 1105,1985 1130,1985 547.86,2010 1120,2010 1470,2020 1200,2105 815,2115 365,2120 335,2125 1220,2125 360,2145 795,2145 835,2145 815,2175 130,2225 1239.25,2225 105,2240 135,2250 1420,2310 1440,2330 1415,2340 1460,2350 1435,2360 830,2415 800,2420 820,2445 1625,2585 1600,2600 1650,2605 1620,2630 1580,2635 880,2682 915,2682 865,2708 900,2708 930,2708
IO9: Q2.3 R3.2 U1.15 | length 1343.9
  Top Layer w10: U1.15 1780,790.38 1780,615 2051.98,343.02 2253.46,343.02 2259.32,337.16 R3.2 2290,305 2314.37,280.63 ; Q2.3 2314.37,280.63 ; 2315,281.26 2314.37,280.63
LED: R11.2 U1.7 | length 1853.7
  Top Layer w10: v1(1200,1205) 1113.77,1118.77 1113.77,948.66 1435,627.43 1435,184.32 R11.2 ; U1.7 1293.73,1776.27 v1(1330,1740)
  Bottom Layer w10: v1(1200,1205) 1200,1207.5 1345,1352.5 1345,1725 v1(1330,1740)
NetC5_2: C5.2 R4.1 R5.2 U2.5 | length 947
  Top Layer w10: v1(675,800) C5.2 725,805 R4.1 725,994.5 U2.5 ; R5.2 v1(890,235)
  Bottom Layer w10: v1(675,800) 675,600 890,385 v1(890,235)
NetC9_2: C9.2 U3.4 | length 87.4
  Top Layer w10: C9.2 U3.4
NetC11_1: C11.1 R12.2 U4.6 | length 140.4
  Top Layer w10: U4.6 420.68,1930 R12.2 C11.1
NetC11_2: C11.2 C15.1 pad.15 PWR1.2 U4.5 U4.7 U4.8 U4.9 | length 2053.5
  Top Layer w10: U4.9@230.75,1980 U4.7 U4.8 355.07,2035.57 380.57,2035.57 390,2045 417.44,2045 C11.2 ; 230.75,2033.66 234.41,2030 ; U4.9 235,1890 245,1880 U4.5
  Top Layer w30: C15.1 230.75,2135 ; U4.9@230.75,1980 230.75,2033.66 230.75,2135 ; PWR1.2 1090,2805 740,2805 230.75,2295.75 230.75,2135
NetC12_1: C12.1 U6.6 | length 110.1
  Top Layer w20: U6.6 1252.4,537.4 1270,555 1309.88,555 C12.1
NetC12_2: C12.2 L2.1 U6.5 | length 504.8
  Top Layer w20: U6.5 C12.2
  Top Layer w30: L2.1 1350,670 1405,615 1405,518.32 1387.43,500.75 1310.75,500.75 C12.2
NetD1_1: D1.1 F1.1 | length 95.4
  Top Layer w30: D1.1 480.51,860.51 574.49,860.51 F1.1
NetD1_2: D1.2 USB1.A4 USB1.A9 USB1.B4 USB1.B9 | length 424.9
  Top Layer w23: USB1.B9@319.17,934.17 333.82,934.17 334.13,934.49 380.51,934.49
  Top Layer w24: USB1.A9@318.65,745 405,745 ; D1.2@473.98,745 D1.2
  Top Layer w30: 380.51,934.49 405,910 405,745 D1.2@473.98,745
NetD3_2: D3.2 L1.2 U2.8 | length 377
  Top Layer w10: L1.2@660,1495 660,1405 720,1345 720,1245.72 D3.2 724.5,1240.52 U2.8
NetD4_2: D4.2 Q3.3 | length 157.9
  Top Layer w30: Q3.3 835.32,410 840,405.31 D4.2
NetD6_1: D6.1 F2.1 | length 91.7
  Top Layer w30: D6.1 D6.1@422.06,1486.05 ; F2.1@507.94,1486.05 F2.1
  Top Layer w35: D6.1@422.06,1486.05 F2.1@507.94,1486.05
NetD6_2: D6.2 USB2.A4 USB2.A9 USB2.B4 USB2.B9 | length 321.9
  Top Layer w23: USB2.A9@318.65,1505 365,1505 420,1560 D6.2 ; 330.67,1694.49 374.49,1694.49 422.24,1646.73 422.24,1610.26 D6.2@425,1607.5
NetLED1_1: LED1.1 U2.2 | length 1507.7
  Top Layer w10: v1(450,1095) U2.2 ; v1(850,155) 848.96,153.96 832.86,153.96 827,148.1 827,68 869.74,25.26 1024.4,25.26 1030.26,31.11 LED1.1
  Bottom Layer w10: v1(450,1095) 450,1027.53 475,1002.53 475,767.5 850,392.5 v1(850,155)
NetLED1_2: LED1.2 LED2.2 R5.1 | length 141.8
  Top Layer w10: R5.1 893.82,121.18 LED1.2
NetLED2_1: LED2.1 U2.4 | length 1230.3
  Top Layer w10: v1(450,995) U2.4 ; v1(850,125) 852.68,122.32 852.68,113.88 908.33,58.23 LED2.1
  Bottom Layer w10: v1(450,995) 450,760 825,385 825,130.86 830.86,125 v1(850,125)
NetLED3_2: LED3.2 R11.1 | length 72.1
  Top Layer w10: LED3.2 1425,115 R11.1
NetLED4_1: LED4.1 R18.2 | length 309.9
  Top Layer w10: LED4.1 1133.21,58.23 1159.96,31.48 1231.48,31.48 1300,100 R18.2
NetLED5_1: LED5.1 R19.2 | length 142.2
  Top Layer w10: LED5.1 1240,117.97 R19.2
NetQ1_1: Q1.1 R1.1 | length 60.4
  Top Layer w10: Q1.1 2115.14,125.2 R1.1
NetQ2_1: Q2.1 R6.1 | length 62
  Top Layer w10: R6.1 2177.26,197.4 Q2.1
NetQ3_1: Q3.1 R13.1 SW4.2 | length 308.2
  Top Layer w10: R13.1 557.6,435 570,447.4 Q3.1 606.83,446.2 648.8,446.2 v1(650,445)
  Bottom Layer w10: SW4.2 645,436.21 650,441.21 v1(650,445)
NetR7_2: R7.2 U1.10 | length 83.1
  Top Layer w10: R7.2 1132.25,1720.97 U1.10
NetR8_2: R8.2 USB1.A5 | length 427.1
  Top Layer w10: R8.2 65,705 249.21,889.21 USB1.A5
NetR9_2: R9.2 USB1.B5 | length 304.5
  Top Layer w10: R9.2 159.32,594.32 192.38,627.38 192.38,714.83 248.65,771.1 USB1.B5
NetR10_2: R10.2 U2.3 | length 75.6
  Top Layer w10: R10.2@420,1044.66 420.34,1045 U2.3
NetR14_1: R14.1 R15.1 R16.1 | length 1388.1
  Top Layer w10: R14.1 949.66,1555.34 R16.1 950,1553.87 960.88,1542.99 962.01,1542.99 v1(1295,1210) ; v1(1830,1255) 1880,1205 1975,1205 R15.1
  Bottom Layer w10: v1(1295,1210) 1297.86,1210 1307.86,1200 1775,1200 v1(1830,1255)
NetR17_2: R17.2 USB2.A5 | length 382.4
  Top Layer w10: USB2.A5 268.34,1649.21 219.83,1697.72 219.83,1784.83 239,1804 316,1804 355,1765 R17.2
NetR20_2: R20.2 USB2.B5 | length 522.7
  Top Layer w10: USB2.B5 258.9,1531.1 203.83,1586.17 203.83,1791.46 232.37,1820 R20.2
PW_5V: C3.2 C4.1 D2.1 D3.1 Q3.2 R13.2 SW4.1 U2.1 | length 1830.6
  Top Layer w10: C3.2 330,1244.88 C4.1 C4.1@361.38,1245 ; D2.1@380,1350 380,1263.62 C4.1@361.38,1245 ; v1(445,360) 445,290 465,270 SW4.1 ; U2.1 495.5,1217.74 522.39,1244.63 D3.1 529.98,1245 C4.1@361.38,1245
  Top Layer w30: 485,372.5 485.1,372.6 Q3.2
  Bottom Layer w30: v1(445,385) 405,425 405,1170 v1(470,1235) ; v1@455,1235 455,1245
  other v1: 395,360 420,360 470,360 395,385 420,385 470,385 420,1235 445,1235 420,1260 445,1260 470,1260
PW_BAT4.2V: C6.2 C7.2 C8.1 L1.1 PWR1.1 R12.1 R14.2 U2.6 | length 2834.1
  Top Layer w30: R12.1 600,1875 ; U2.6 780.47,1045 783.03,1042.44 C8.1 785.75,1043.19 838.94,1043.19 882.87,1087.13 ; 820,1615 R14.2
  Top Layer w50: 600,1875 600,2320 910.9,2630.9 952.33,2630.9 1028.94,2554.29 PWR1.1 ; 600,1890 670.33,1819.67 670.33,1749.37 691.59,1728.11 L1.1 721.26,1706.85 790.71,1706.85 820,1677.56 820,1615 820,1380.62 810,1370.62 810,1185 C6.2@907.87,1087.13 ; C6.2 925.32,1084.06 1004.68,1084.06 C7.2
PW_D3.3V: C1.2 C2.2 C10.2 C13.2 C14.2 C17.2 C18.2 L2.2 R2.1 R3.1 R7.1 U1.2 U3.16 U5.3 U5.6 U6.1 | length 5535.8
  Top Layer w10: U5.6@900.46,1925.15 979.49,1846.12 C13.2 980.51,1844.49 v1(1020,1805) 1020,1738.05 R7.1 ; U5.3 1053.99,2384.49 1068.42,2398.93 1070.98,2398.93 C14.2 1126.02,2458.98 v1(1095,2490) ; v1(1225,2185) 1347.5,2062.5 1347.5,2057.5 1394.49,2010.51 C2.2 1457.98,1953.05 U1.2
  Top Layer w15: v1(1730,470) 1731.28,468.72 1803.72,468.72 C10.2 1805,425 1825,405 U3.16 ; R2.1 v1(2147.5,305) R3.1
  Top Layer w40: C18.2 C17.2 1095.38,715.63 1105,706.01 L2.2@1106.88,704.13 ; L2.2 1110,666.88 U6.1@1110,546.06
  Top Layer w50: 1105,765 1105,706.01 1105,671.88 L2.2
  Bottom Layer w15: v1(1730,470) 1830,470 1995,305 v1(2147.5,305)
  Bottom Layer w30: v1(1020,1805) 950,1735 849.26,1735 ; v1(1090,805) 1090,1045.16 849.26,1285.91 849.26,1735 ; 1180,792.5 1407.5,792.5 v1(1730,470) ; v1(1225,2185) 1220,2185 1185,2220 1185,2400 v1(1095,2490) 1000.19,2584.81 849.81,2584.81 706.4,2441.4 706.4,1877.85 849.26,1735
  other v1: 1090,780 1115,780 1140,780 1165,780 1115,805 1140,805 1165,805
PW_D5V: C16.1 D4.1 D5.1 U6.2 U6.3 | length 337.2
  Top Layer w30: D4.1 961.53,405.51 961.53,494.49 D5.1 961.02,495.31 965.71,500 U6.2 U6.3 1113.75,462.6 1117.92,458.43 C16.1@1117.92,409.89
PW_USB5V: D5.2 F1.2 F2.2 R4.2 | length 1789.9
  Top Layer w30: R4.2@838.98,877.54 R4.2
  Top Layer w40: F1.2 770,746.22 773.78,750 v1(795,750) v1(820,725) ; D5.2 838.98,690.42 820,709.4 v1(820,725) ; R4.2@838.98,877.54 838.98,743.98 v1(820,725)
  Bottom Layer w40: v1(510,1660) 510,1485 845,1150 v1(845,750) ; v1@835,680 835,700 820,715 820,735 v1@835,750
  other v1: 770,675 795,675 820,675 845,675 770,700 795,700 820,700 845,700 770,725 795,725 845,725 770,750 820,750 485,1660 535,1660 485,1685 510,1685 535,1685
RTS: Q1.2 R6.2 U3.14 | length 306.9
  Top Layer w10: U3.14 v1(1940,305) ; v1(2055,250) Q1.2 R6.2
  Bottom Layer w10: v1(1940,305) 1995,250 v1(2055,250)
RXD: U1.24 U3.2 | length 1233.7
  Top Layer w10: v1(1560,970) 1558,968 1558,393.82 1596.82,355 U3.2 ; U1.24 1875,1331.78 v1(1875,1285)
  Bottom Layer w10: v1(1560,970) 1580,970 1875,1265 v1(1875,1285)
TXD: U1.25 U3.3 | length 1374.2
  Top Layer w10: v1(1530,910) 1530,370 1595,305 U3.3 ; U1.25 1927.32,1350.17 1927.32,1310.15 v1(1930,1307.47)
  Bottom Layer w10: v1(1530,910) 1550,910 1929.64,1289.64 1929.64,1307.12 v1(1930,1307.47)
pads on no net: U1.4 U1.5 U1.6 U1.22 U1.23 U1.26 U3.7 U3.8 U3.9 U3.10 U3.11 U3.12 U3.15 U4.1 USB1.A8 USB1.B8 USB2.A8 USB2.B8
copper on no net: | length 14.1
  Top Layer w10: 820.12,2325 830.12,2315

## Polygon pours and split planes (outlines as drawn)
PW_USB5V on Top Layer "PW_USB5V_L01_P016" (solid, pour order 16): 860,660 755,660 755,765 860,765
PW_USB5V on Top Layer "PW_USB5V_L01_P014" (solid, pour order 14): 473.45,1575 550,1575 550,1700 473.45,1700
GND on Top Layer "top_gnd" (solid, remove dead copper, pour order 18): 195.55,0.26 198.66,0.26 cw(c197.11,197.11) 0.26,198.66 0.26,1968.76 cw(c984.51,1968.76) 1751.02,2586.18 1367.44,2202.61 1785.02,1785.02 2202.61,1367.44 2586.18,1751.02 cw(c1968.76,984.51) 1968.76,0.26
NetC5_2 on Top Layer "NETC5_2_L01_P013" (solid, pour order 13): 700,784.25 739.25,784.25 748.77,793.77 748.77,1010 700,1010
PW_5V on Top Layer "PW_5V_L01_P012" (solid, pour order 12): 310,1050 314.24,1054.24 344.97,1054.24 344.97,1164.97 390,1210 490,1210 490,1180 470,1160 470,1130 520,1130 526.34,1136.34 526.34,1161.34 575,1210 575,1280 485,1280 480,1275 405,1275 405,1300 430,1325 430,1376.87 370.63,1376.87 368.4,1374.63 370,1373.03 370,1280 265,1280 255,1270 255,1215 285,1215 310,1190
NetD3_2 on Top Layer "NETD3_2_L01_P010" (solid, pour order 10): 700,1165 675,1190 675,1355 625,1405 625,1540 770,1540 770,1155 745,1130 700,1130
PW_5V on Top Layer "PW_5V_top2" (solid, pour order 7): 374.61,400 485,400 485,345 374.61,345
NetC11_2 on Top Layer "battery_gnd" (solid, pour order 2): 1165,2630 1235,2630 1477.5,2872.5 1370,2980 550,2980 178.9,2608.9 178.9,2471.1 178.9,2055.39 185,2049.29 185,2024.69 185,1892.8 212.8,1865 375,1865 375,1895 310,1895 310,1965 375,1965 375,2055 374.61,2055.39 291.11,2055.39 291.11,2301.11 755,2765 1030,2765
PW_D3.3V on Top Layer "PW_D3.3V_L01_P009" (solid, pour order 9): 1075,820 1075,765 1180,765 1180,820
GND on Bottom Layer "buttom_gnd" (solid, remove dead copper, pour order 19): 195.55,0.26 198.66,0.26 cw(c197.11,197.11) 0.26,198.66 0.26,1968.76 cw(c984.51,1968.76) 1751.02,2586.18 1367.44,2202.61 1785.02,1785.02 2202.61,1367.44 2586.18,1751.02 cw(c1968.76,984.51) 1968.76,0.26
PW_USB5V on Bottom Layer "PW_USB5V_L02_P017" (solid, pour order 17): 755,765 860,765 860,660 755,660
PW_USB5V on Bottom Layer "PW_USB5V_L02_P015" (solid, pour order 15): 473.45,1700 550,1700 550,1637.5 473.45,1637.5
PW_5V on Bottom Layer "PW_5V_L02_P011" (solid, pour order 11): 405,1275 405,1220 485,1220 485,1275
PW_D3.3V on Bottom Layer "PW_D3.3V_L02_P008" (solid, pour order 8): 1075,820 1075,765 1180,765 1180,820
PW_5V on Bottom Layer "PW_5V_bottom2" (solid, pour order 6): 374.61,400 485,400 485,345 374.61,345

## Silkscreen, mask and mechanical layers (free items; w line width, h text height)
Top Overlay:
  text "-" at 1281.46,2760.6 h30 r135
  text "+" at 1413.53,2600.61 h30 r45
Bottom Overlay:
  text "-" at 1281.46,2760.6 h30 r135
  text "+" at 1413.53,2600.61 h30 r45
Mechanical 1:
  circle w0.5: c2567.3,385.97 r39.37
  circle w0.5: c385.97,2567.3 r39.37
  circle w0.5: c177.42,177.42 r39.37
  lines w0.5: 0.26,195.55 0.26,1968.76 cw(c984.51,1968.76) 1751.02,2586.18 1367.44,2202.61 1785.02,1785.02 2202.61,1367.44 2586.18,1751.02 cw(c1968.76,984.51) 1968.76,0.26 195.55,0.26 198.66,0.26 cw(c197.11,197.11) 0.26,198.66 ; 0.26,195.55 0.26,198.66 ; 0.26,195.55 0.26,198.66
Drill Drawing:
  text ".Legend" at 3200,1169.99 h60